# Altium PCB P-TK-05-2FC-A-MB(V1.1)-20171225.PcbDoc (part 2 of 3)
Units mm, origin at the board's own origin, x right, y up, seen from the top; angles counter-clockwise.
Board outline 82.48 x 84.99 mm, 2 copper layers (Top Layer, Bottom Layer); 89 components, 88 nets, 340 pads, 147 vias.
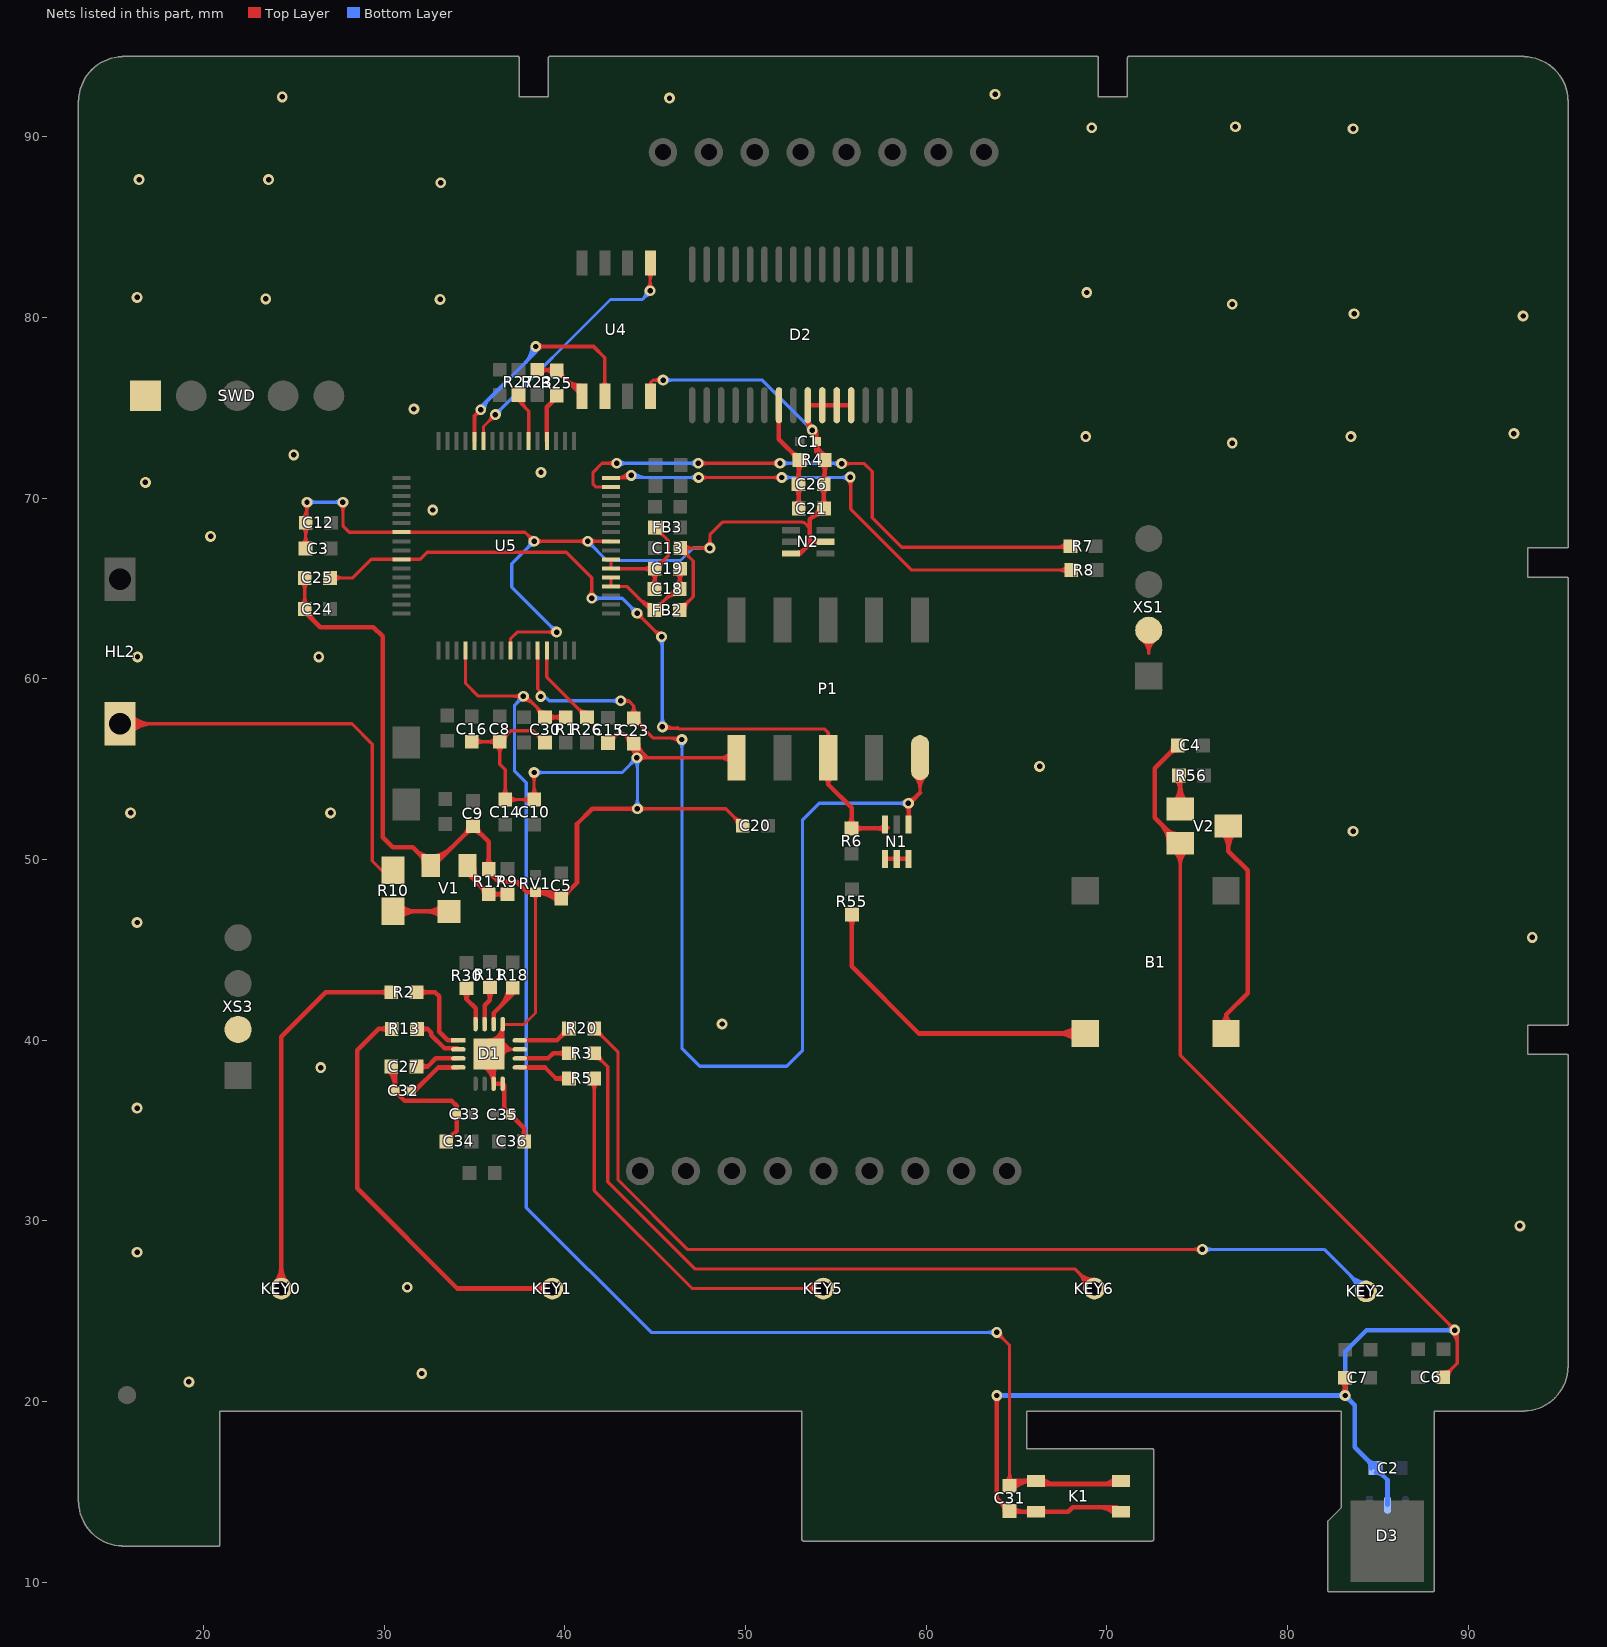
[diagram p2: the nets of this part, all layers, seen from the top]

## Via types
v1: diameter 0.6, hole 0.3, Top Layer to Bottom Layer, tented both sides, 146 vias
v2: diameter 0.5, hole 0.3, Top Layer to Bottom Layer, tented both sides, 1 vias

## Nets (pads, with @x,y where several pads share a name; then routed paths per layer and width w, separated by ;. In a path a pad name is that pad's centre, name@x,y a point inside that pad or via, vN(x,y) a via of type N, cw(c..) or ccw(c..) an arc to the next point about the centre after c; other vN are vias at no path point) (continued)
GND: C1.1 C2.1 C3.1 C4.1 C5.1 C6.1 C7.2 C8.1 C9.1 C10.2 C12.1 C13.1 C14.1 C15.1 C16.1 C20.1 C21.1 C23.2 C24.2 C25.2 C26.1 C27.2 C30.1 C31.1 C32.1 C33.1 C34.2 C35.1 C36.2 D1.7 D1.8 D1.11 D1.13 D1.17 D2.25 D2.26 D2.27 D2.28 D3.2 FB2.1 K1.2 K1.4 N1.1 N1.2 N1.3 N2.2 N2.6 P1.9 R4.1 R17.1 RV1.1 SWD.1 U4.4 U5.9 U5.25 U5.55 V1.S V2.E XS1.2 XS3.2 | length 390.1
  Top Layer w0.178: C24.2@25.397,64.062 ccw(c24.898,64.561) 25.603,64.561 ccw(c26.308,64.561) C24.2@25.81,64.062 ; C25.2@25.397,65.376 cw(c24.898,64.878) 25.603,64.878 cw(c26.308,64.878) C25.2@25.81,65.376 ; C3.1@25.447,67.415 ccw(c24.949,67.914) 25.654,67.914 ccw(c26.359,67.914) C3.1@25.861,67.415 ; C12.1@25.46,68.424 cw(c24.992,67.956) 25.654,67.956 ; C12.1@25.46,68.837 ccw(c24.805,69.493) v1@25.732,69.493 ; v1@25.582,69.624 cw(c25.222,69.264) 25.732,69.264 cw(c26.241,69.264) v1@25.881,69.624 ; C12.1@25.586,68.712 ccw(c25.234,69.064) 25.732,69.064 ; C24.2@25.603,63.856 C25.2@25.603,65.583 ; C3.1@25.654,67.208 25.654,68.631 C12.1@25.667,68.631 25.732,68.696 v1(25.732,69.774) ; 25.654,67.895 cw(c26.403,67.895) C12.1@25.873,68.424 ; 25.732,69.179 ccw(c26.215,69.179) C12.1@25.873,68.837 ; v1@27.571,69.624 cw(c27.21,69.264) 27.72,69.264 cw(c28.23,69.264) v1@27.869,69.624 ; v1(27.72,69.774) 27.72,68.46 28.069,68.111 U5.55@30.954,68.111 37.801,68.111 v1(38.301,67.611) v1(41.269,67.611) U5.25@42.554,67.611 ; C27.2@30.402,38.539 C27.2@30.605,38.336 ; C16.1@34.849,56.515 C8.1@36.398,56.515 ; C16.1@35.055,56.308 cw(c35.554,55.81) 35.554,56.515 cw(c35.554,57.22) C16.1@35.055,56.722 ; D1.17@35.754,39.996 ccw(c35.687,40.868) D1.13@36.562,40.868 ; D1.17@35.768,39.818 ccw(c35.702,40.676) D1.13@36.562,40.676 ; D1.17@35.781,39.641 ccw(c35.716,40.484) 36.562,40.484 ; R17.1@35.787,49.322 R17.1@35.787,49.474 ; D1.17@35.795,39.464 ccw(c35.731,40.292) 36.562,40.292 ; D1.17@35.808,39.287 ccw(c35.746,40.1) 36.562,40.1 ; D1.17@35.822,39.109 ccw(c35.761,39.909) D1.17@36.562,39.909 ; D1.17@36.062,38.987 36.062,39.237 D1.17@35.812,39.237 D1.17@36.062,39.487 ; C8.1@36.192,56.722 cw(c35.693,57.22) 35.693,56.515 cw(c35.693,55.81) 36.192,56.308 cw(c35.693,55.81) 36.398,55.81 cw(c37.103,55.81) C8.1@36.605,56.308 ; C8.1@36.398,56.807 ccw(c36.398,57.512) 36.897,57.014 ccw(c37.396,56.515) C8.1@36.69,56.515 ; C14.1@36.498,53.52 ccw(c35.999,54.018) 36.705,54.018 ccw(c37.41,54.018) 36.911,53.52 ccw(c37.41,54.018) 37.41,53.313 ccw(c37.41,52.608) C14.1@36.911,53.107 ; D1.13@36.562,40.887 D1.13@36.562,40.868 ; D1.13@36.588,40.912 ccw(c36.694,41.019) 36.694,40.868 ; U5.9@37.004,61.561 37.004,62.23 37.359,62.585 v1(39.549,62.585) ; 37.314,48.768 37.319,48.763 37.467,48.615 ; D1.11@37.512,39.487 36.953,39.487 36.562,39.878 D1.13@36.562,40.868 ; v1@38.09,67.611 ccw(c37.58,67.611) 37.941,67.971 ccw(c38.301,68.332) v1@38.301,67.822 ; C10.2@38.098,53.107 ccw(c37.6,52.608) 37.6,53.313 ccw(c37.6,54.018) 38.098,53.52 ccw(c37.6,54.018) 38.305,54.018 ccw(c39.01,54.018) C10.2@38.511,53.52 ; v1@38.156,54.664 cw(c37.795,54.303) 38.305,54.303 cw(c38.814,54.303) v1@38.454,54.664 ; RV1.1@38.248,48.052 cw(c37.93,47.735) 38.379,47.735 cw(c38.829,47.735) RV1.1@38.511,48.052 ; v1(38.305,54.813) C10.2@38.305,53.313 C14.1@36.705,53.313 36.705,54.965 36.398,55.272 C8.1@36.398,56.515 ; RV1.1@38.379,48.184 38.379,41.503 37.744,40.868 D1.13@36.562,40.868 ; v1@38.45,67.462 cw(c38.811,67.101) 38.811,67.611 cw(c38.811,68.12) v1@38.45,67.76 ; C30.1@38.621,56.477 ccw(c37.916,56.477) 38.414,56.976 ccw(c38.913,57.474) C30.1@38.913,56.769 ; C30.1@38.913,56.477 38.265,57.125 37.008,57.125 C8.1@36.398,56.515 ; v1@39.4,62.436 ccw(c39.04,62.076) 39.04,62.585 ccw(c39.04,63.095) v1@39.4,62.735 ; v1@41.12,67.462 ccw(c40.759,67.101) 40.759,67.611 ccw(c40.759,68.12) v1@41.12,67.76 ; v1@41.418,67.462 cw(c41.779,67.101) 41.779,67.611 cw(c41.779,68.12) v1@41.418,67.76 ; C15.1@42.393,56.452 42.913,56.972 43.256,56.972 C23.2@43.815,56.413 C23.2@43.893,56.336 ; C15.1@42.393,56.744 ccw(c42.393,57.449) 42.891,56.95 ccw(c43.39,56.452) C15.1@42.685,56.452 ; C23.2@43.523,56.413 ccw(c42.818,56.413) 43.316,56.912 ccw(c43.815,57.411) C23.2@43.815,56.706 ; C23.2@43.628,56.189 cw(c43.153,55.622) v1@43.893,55.622 ; C23.2@43.742,56.326 cw(c43.471,56.002) 43.893,56.002 ; C23.2@43.815,56.121 cw(c43.815,55.416) 44.314,55.915 cw(c44.812,56.413) C23.2@44.107,56.413 ; v1@43.893,55.626 C23.2@43.893,56.336 ; v1@43.893,55.896 cw(c44.333,55.896) C23.2@44.022,56.207 ; 43.893,55.932 ccw(c44.275,55.932) v1@44.017,55.65 ; v1(43.994,55.626) 44.603,55.626 ; v1(44.02,52.806) 48.908,52.806 C20.1@49.848,51.867 ; v1@44.137,55.782 cw(c44.644,56.336) C23.2@43.893,56.336 ; v1@44.144,55.476 cw(c44.504,55.116) 44.504,55.626 cw(c44.504,56.135) v1@44.144,55.775 ; v1@44.169,52.657 cw(c44.529,52.297) 44.529,52.806 cw(c44.529,53.316) v1@44.169,52.956 ; U4.4@44.65,76.224 ccw(c44.552,76.401) 44.755,76.401 ; U4.4@44.755,75.641 44.755,76.401 ; U4.4@44.859,76.224 cw(c44.958,76.401) 44.755,76.401 ; v1@45.293,76.381 ccw(c44.932,76.02) 44.932,76.53 ccw(c44.932,77.04) v1@45.293,76.679 ; v1(45.442,76.53) 44.883,76.53 44.755,76.401 ; FB2.1@46.368,63.805 47.11,64.547 47.11,66.517 C13.1@46.393,67.234 v1(48.033,67.234) 48.033,67.979 48.725,68.671 53.143,68.671 53.157,68.656 53.24,68.656 53.57,68.326 ; FB2.1@46.368,64.097 ccw(c46.368,64.802) 46.866,64.303 ccw(c47.365,63.805) FB2.1@46.66,63.805 ; C13.1@46.393,66.942 cw(c46.393,66.237) 46.892,66.735 cw(c47.39,67.234) C13.1@46.685,67.234 ; C13.1@46.6,67.027 cw(c47.098,66.529) 47.098,67.234 cw(c47.098,67.939) C13.1@46.6,67.44 ; v1@47.884,67.085 ccw(c47.523,66.724) 47.523,67.234 ccw(c47.523,67.743) 47.884,67.383 ccw(c47.523,67.743) 48.033,67.743 ccw(c48.543,67.743) v1@48.182,67.383 ; 48.492,55.626 ccw(c48.492,56.644) P1.9@49.212,55.924 ; 48.529,55.626 cw(c48.529,54.659) P1.9@49.212,55.343 ; 48.922,55.626 ccw(c48.922,56.215) P1.9@49.338,55.798 ; 48.958,55.626 cw(c48.958,55.088) P1.9@49.338,55.468 ; P1.9@49.503,55.633 49.503,55.626 44.603,55.626 ; C20.1@49.555,51.867 ccw(c48.85,51.867) 49.349,52.365 ccw(c49.848,52.864) C20.1@49.848,52.159 ; N2.6@52.532,66.929 N2.6@53.019,66.929 ; D2.25@53.389,74.254 cw(c53.233,74.098) 53.453,74.098 cw(c53.673,74.098) D2.25@53.518,74.254 ; D2.25@53.453,75.138 53.453,74.137 ; v1(53.697,73.761) 53.453,74.005 53.453,74.137 ; N1.1@57.728,49.682 N1.1@57.728,50.029 ; XS1.2@71.939,62.147 cw(c71.42,61.417) 72.315,61.417 ; XS1.2@72.042,62.292 cw(c71.665,61.762) 72.315,61.762 ; 72.315,61.755 cw(c72.962,61.755) XS1.2@72.595,62.288 ; XS1.2@72.322,62.686 72.315,62.68 72.315,61.417 ; XS1.2@72.696,62.141 ccw(c73.194,61.417) 72.315,61.417 ; V2.E@73.679,50.51 cw(c72.746,49.578) 74.065,49.578 cw(c75.383,49.578) V2.E@74.451,50.51 ; V2.E@73.804,50.636 cw(c73.176,50.007) 74.065,50.007 cw(c74.954,50.007) V2.E@74.325,50.636 ; V2.E@74.065,50.896 74.065,39.17 89.257,23.977 v1(89.257,23.952) 89.4,23.809 89.4,22.115 C6.1@88.621,21.336 ; C6.1@88.621,21.628 ccw(c88.621,22.333) 89.119,21.835 ccw(c89.618,21.336) C6.1@88.913,21.336 ; 88.879,24.356 cw(c88.475,23.952) v1@89.046,23.952 ; 88.94,24.294 ccw(c89.257,24.611) v1@89.257,24.163 ; v1@89.108,23.803 cw(c88.403,23.097) 89.4,23.097 ; v1@89.234,23.928 cw(c88.832,23.527) 89.4,23.527 ; C23.2@43.893,56.336 44.603,55.626 ; 53.453,74.137 ccw(c53.318,74.137) 53.399,74.245 cw(c53.318,74.137) 53.453,74.137 ; 53.453,74.137 cw(c53.589,74.137) 53.508,74.245 ccw(c53.589,74.137) 53.453,74.137
  Top Layer w0.254: C24.2@25.603,63.602 cw(c25.603,63.324) C24.2@25.8,63.52 ; C24.2@25.603,63.856 25.603,63.717 26.46,62.86 29.41,62.86 29.92,62.35 29.92,51.223 30.47,50.673 31.578,50.673 V1.S@32.587,49.664 32.743,49.664 C9.1@34.918,51.839 35.787,50.971 R17.1@35.787,49.474 ; C24.2@25.857,63.856 ccw(c26.806,63.856) 26.135,63.185 ; C27.2@30.223,38.359 cw(c29.298,37.435) C32.1@30.605,37.435 ; C27.2@30.402,38.539 cw(c29.912,38.049) 30.605,38.049 ; C32.1@30.516,37.283 ccw(c30.299,37.499) 30.605,37.499 ccw(c30.912,37.499) C32.1@30.695,37.283 ; C32.1@30.605,37.066 cw(c30.605,36.819) C32.1@30.78,36.993 ; C27.2@30.605,38.336 C32.1@30.605,37.193 30.605,37.168 31.14,36.634 33.738,36.634 34.011,36.362 C33.1@34.011,35.898 34.011,34.972 C34.2@33.435,34.396 ; C32.1@30.732,37.193 ccw(c31.098,37.193) 30.84,36.934 ; 31.719,50.531 ccw(c32.587,51.399) 32.587,50.172 ccw(c32.587,51.776) 33.721,50.642 ; 32.026,50.225 cw(c31.592,49.791) V1.S@32.206,49.791 ; V1.S@32.153,50.098 ccw(c32.587,50.531) 32.587,49.918 ccw(c32.587,50.909) 33.287,50.208 ; C34.2@33.435,34.65 ccw(c33.435,35.264) 33.869,34.83 ccw(c34.302,34.396) C34.2@33.689,34.396 ; C33.1@33.921,35.808 cw(c33.704,35.591) 34.011,35.591 cw(c34.317,35.591) C33.1@34.1,35.808 ; C33.1@33.921,35.988 ccw(c33.704,36.204) 34.011,36.204 ccw(c34.317,36.204) C33.1@34.1,35.988 ; C9.1@34.664,51.839 cw(c34.051,51.839) 34.485,51.406 cw(c34.918,50.972) 34.918,51.585 cw(c34.918,50.972) 35.352,51.406 cw(c35.785,51.839) C9.1@35.172,51.839 ; D1.17@35.456,38.608 cw(c34.868,37.568) D1.7@36.062,37.568 ; D1.17@35.581,38.829 cw(c35.114,38.004) 36.062,38.004 ; R17.1@35.607,49.653 ccw(c35.174,50.087) 35.787,50.087 ccw(c36.4,50.087) R17.1@35.967,49.653 ; R17.1@35.787,49.322 36.347,48.763 37.319,48.763 37.336,48.763 37.914,48.184 RV1.1@38.379,48.184 ; 36.062,38.095 cw(c36.954,38.095) D1.17@36.323,38.726 ; D1.17@36.062,38.987 D1.7@36.062,37.587 D1.8@36.562,37.587 36.652,37.497 36.652,36.228 C35.1@37.008,35.872 37.753,35.127 C36.2@37.753,34.396 ; D1.17@36.062,39.487 36.953,39.487 ; D1.17@36.275,39.163 cw(c36.655,39.102) D1.17@36.655,39.487 ; D1.17@36.324,39.748 ccw(c36.953,40.376) 36.953,39.487 ; D1.17@36.526,39.123 cw(c36.953,39.055) 36.953,39.487 ; D1.8@36.564,37.313 cw(c36.35,37.099) 36.652,37.099 ; C35.1@36.881,35.872 ccw(c36.574,35.872) 36.791,36.089 ccw(c37.008,36.306) C35.1@37.008,35.999 ; C35.1@37.008,35.745 cw(c37.008,35.439) 37.225,35.656 cw(c37.441,35.872) C35.1@37.135,35.872 ; C36.2@37.574,34.576 ccw(c37.14,35.01) 37.753,35.01 ccw(c38.366,35.01) C36.2@37.933,34.576 ; RV1.1@38.25,48.079 ccw(c37.997,47.827) 37.997,48.184 ccw(c37.997,48.541) RV1.1@38.25,48.288 ; RV1.1@38.509,48.079 cw(c38.762,47.827) 38.762,48.184 cw(c38.762,48.541) RV1.1@38.509,48.288 ; 38.985,48.184 cw(c38.985,47.039) C5.1@39.802,47.841 ; C5.1@39.621,47.663 ccw(c38.379,46.445) RV1.1@38.379,48.184 ; C5.1@39.802,48.095 ccw(c39.802,48.708) 40.235,48.275 ccw(c40.669,47.841) C5.1@40.056,47.841 ; v1@43.897,52.684 ccw(c43.602,52.389) 43.602,52.806 ccw(c43.602,53.224) v1@43.897,52.929 ; v1(44.02,52.806) 41.516,52.806 40.675,51.965 40.675,48.714 C5.1@39.802,47.841 ; N2.6@52.857,66.977 ccw(c52.857,67.484) 53.215,67.125 ; N2.6@53.019,66.929 53.57,67.48 ; 53.453,74.137 53.924,73.666 C1.1@53.924,73.127 ; D2.25@53.453,75.138 D2.26@54.253,75.138 D2.27@55.053,75.138 D2.28@55.853,75.138 ; D2.25@53.506,74.318 ccw(c54.073,74.318) v1@53.672,73.918 ; 53.594,68.854 cw(c54.343,68.104) C21.1@54.343,69.164 ; v1@53.614,73.61 cw(c53.329,73.087) C1.1@53.924,73.087 ; v1@53.736,73.832 cw(c53.563,73.515) 53.924,73.515 ; C1.1@53.834,73.037 cw(c53.618,72.82) 53.924,72.82 cw(c54.231,72.82) C1.1@54.014,73.037 ; C1.1@53.834,73.216 ccw(c53.618,73.433) 53.924,73.433 ccw(c54.231,73.433) C1.1@54.014,73.216 ; 53.924,72.77 ccw(c54.622,72.77) R4.1@54.394,72.111 ; R4.1@54.14,72.111 ccw(c53.527,72.111) 53.961,72.544 ccw(c54.394,72.978) R4.1@54.394,72.365 ; C26.1@54.151,70.585 cw(c53.717,70.151) 54.331,70.151 cw(c54.944,70.151) C26.1@54.51,70.585 ; C26.1@54.151,70.944 ccw(c53.564,71.531) 54.394,71.531 ; C21.1@54.164,69.598 ccw(c53.761,70.001) 54.331,70.001 ; R4.1@54.215,71.931 cw(c53.781,71.497) 54.394,71.497 cw(c55.007,71.497) R4.1@54.574,71.931 ; 54.331,70.062 ccw(c54.987,70.062) C21.1@54.523,69.598 ; 54.394,71.224 ccw(c54.791,71.224) C26.1@54.51,70.944 ; N2.2@54.432,67.579 53.669,67.579 53.57,67.48 ; R4.1@54.477,72.351 cw(c54.745,73.127) C1.1@53.924,73.127 ; N1.1@57.728,50.029 N1.2@58.378,50.029 N1.3@59.028,50.029 ; v1@63.788,20.208 cw(c63.492,19.912) 63.91,19.912 cw(c64.328,19.912) v1@64.032,20.208 ; v1(63.91,20.33) 63.91,14.645 C31.1@64.616,13.939 64.653,13.902 K1.2@66.089,13.902 67.861,13.902 68.108,14.149 70.541,14.149 K1.4@70.788,13.902 ; C31.1@64.362,13.939 ccw(c63.749,13.939) 64.182,14.373 ccw(c64.616,14.806) C31.1@64.616,14.193 ; C31.1@64.796,13.76 cw(c65.14,13.415) 65.14,13.902 ; C31.1@64.796,14.119 ccw(c65.319,14.642) 65.319,13.902 ; K1.2@65.774,13.762 ccw(c65.436,13.424) 65.436,13.902 ccw(c65.436,14.38) K1.2@65.774,14.042 ; K1.2@66.404,13.762 cw(c66.742,13.424) 66.742,13.902 cw(c66.742,14.38) K1.2@66.404,14.042 ; 69.539,14.149 cw(c69.539,12.828) K1.4@70.473,13.762 ; 70.152,14.149 cw(c70.152,13.441) K1.4@70.653,13.942 ; 72.981,51.98 cw(c71.897,50.896) V2.E@73.43,50.896 ; 73.287,51.674 ccw(c73.938,52.324) V2.E@73.938,51.404 ; 73.414,51.547 cw(c72.764,50.896) V2.E@73.684,50.896 ; C4.1@73.673,56.312 cw(c73.06,56.312) 73.493,55.878 cw(c73.927,55.445) C4.1@73.927,56.058 ; C4.1@73.927,56.312 72.66,55.045 72.66,52.301 V2.E@74.065,50.896 ; C7.2@83.005,21.131 cw(c82.572,20.697) 83.185,20.697 cw(c83.798,20.697) C7.2@83.365,21.131 ; v1@83.068,20.452 ccw(c82.784,20.736) 83.185,20.736 ; 83.185,20.76 ccw(c83.62,20.76) v1@83.312,20.452 ; C7.2@83.185,21.311 v1@83.185,20.355 ; RV1.1@38.379,48.184 39.459,48.184 C5.1@39.802,47.841 ; 53.57,67.48 53.57,68.326 53.57,68.83 54.158,69.418 C21.1@54.343,69.418 54.331,69.431 C26.1@54.331,70.764 54.394,70.828 R4.1@54.394,72.111 ; C1.1@53.924,73.127 53.924,72.581 R4.1@54.394,72.111 ; v1@83.185,20.355 83.2,20.34 83.21,20.33 v1(83.19,20.33) v1@83.185,20.355
  Bottom Layer w0.178: v1(25.732,69.774) v1(27.72,69.774) ; v1@25.881,69.624 cw(c26.241,69.264) 26.241,69.774 cw(c26.241,70.283) v1@25.881,69.923 ; v1@27.571,69.624 ccw(c27.21,69.264) 27.21,69.774 ccw(c27.21,70.283) v1@27.571,69.923 ; v1@38.09,67.611 cw(c37.58,67.611) 37.941,67.25 cw(c38.301,66.89) v1@38.301,67.4 ; v1(38.301,67.611) 37.06,66.37 37.06,65.075 v1(39.549,62.585) ; v1(38.305,54.813) 43.182,54.813 v1@43.944,55.575 ; v1@38.454,54.664 cw(c38.814,54.303) 38.814,54.813 cw(c38.814,55.323) v1@38.454,54.962 ; v1@39.338,62.585 ccw(c38.829,62.585) 39.189,62.946 ccw(c39.549,63.306) v1@39.549,62.796 ; v1@41.269,67.4 cw(c41.269,66.89) 41.629,67.25 cw(c41.99,67.611) v1@41.48,67.611 ; v1(41.269,67.611) 42.332,66.548 46.407,66.548 47.093,67.234 v1(48.033,67.234) ; v1@43.783,55.626 cw(c43.274,55.626) 43.634,55.265 cw(c43.994,54.905) v1@43.994,55.415 ; v1@43.845,55.476 cw(c43.423,55.055) 44.02,55.055 ; v1@43.87,52.956 ccw(c43.51,53.316) 44.02,53.316 ccw(c44.529,53.316) v1@44.169,52.956 ; v1@43.893,55.626 v1@43.944,55.575 ; v1(43.994,55.626) v1@43.944,55.575 ; v1(44.02,52.806) 44.02,55.499 v1@43.944,55.575 ; 44.02,55.177 cw(c44.443,55.177) v1@44.144,55.476 ; v1(45.442,76.53) 50.929,76.53 v1(53.697,73.761) ; v1@45.591,76.381 cw(c45.952,76.02) 45.952,76.53 cw(c45.952,77.04) v1@45.591,76.679 ; v1@47.884,67.085 ccw(c47.523,66.724) 47.523,67.234 ccw(c47.523,67.743) v1@47.884,67.383 ; v1@53.486,73.761 ccw(c52.976,73.761) 53.337,74.122 ccw(c53.697,74.482) v1@53.697,73.972
  Bottom Layer w0.254: v1(63.91,20.33) v1(83.19,20.33) ; v1@64.032,20.208 cw(c64.328,19.912) 64.328,20.33 cw(c64.328,20.748) v1@64.032,20.452 ; v1@83.068,20.208 ccw(c82.772,19.912) 82.772,20.33 ccw(c82.772,20.748) 83.068,20.452 ccw(c82.772,20.748) 83.19,20.748 ccw(c83.608,20.748) v1@83.312,20.452 ; v1@83.185,20.355 v1(83.19,20.33) ; v1@83.19,20.157 cw(c83.19,19.739) 83.485,20.035 cw(c83.781,20.33) v1@83.363,20.33 ; C2.1@84.623,16.313 ccw(c84.01,16.313) 84.443,16.747 ccw(c84.877,17.18) C2.1@84.877,16.567 ; C2.1@84.877,16.059 cw(c84.877,15.446) 85.311,15.88 cw(c85.744,16.313) C2.1@85.131,16.313 ; D3.2@85.534,14.281 85.534,15.656 C2.1@84.877,16.313 83.731,17.459 83.731,19.789 v1(83.19,20.33) ; v1@89.135,23.83 ccw(c88.839,23.534) 88.839,23.952 ccw(c88.839,24.37) v1@89.135,24.074 ; v1(89.257,23.952) 84.372,23.952 83.19,22.77 v1(83.19,20.33)
  other v1: 19.2,21.082 32.082,21.55 31.28,26.32 16.334,28.26 92.86,29.718 16.334,36.24 26.494,38.48 48.71,40.894 93.55,45.69 16.334,46.51 83.63,51.562 15.97,52.578 27.04,52.578 66.28,55.15 16.35,61.214 26.38,61.214 20.398,67.88 32.69,69.342 16.79,70.866 38.686,71.42 25,72.39 76.94,73.04 68.83,73.406 83.51,73.406 92.534,73.57 31.65,74.93 93.042,80.08 83.69,80.2 76.94,80.73 33.098,81 23.45,81.026 16.334,81.11 68.89,81.38 33.14,87.453 16.44,87.63 23.61,87.63 83.63,90.44 69.166,90.5 77.12,90.55 45.798,92.14 24.36,92.202 63.82,92.35
ISP0: R26.2 U5.13 | length 5.7
  Top Layer w0.178: U5.13@39.004,61.561 39.004,60.094 R26.2@41.224,57.874 ; R26.2@40.932,57.874 ccw(c40.227,57.874) 40.726,58.373 ccw(c41.224,58.871) R26.2@41.224,58.166
ISP1: R27.2 U5.38 | length 4
  Top Layer w0.178: R27.2@37.44,75.705 37.44,75.38 38.004,74.816 U5.38@38.004,73.161 ; R27.2@37.546,75.663 ccw(c37.974,75.496) 37.649,75.171 ; R27.2@37.712,75.598 ccw(c38.251,75.388) 37.842,74.978
KEY: C30.2 C31.2 K1.1 K1.3 R1.1 U5.4 | length 94.4
  Top Layer w0.178: U5.4@34.504,61.561 34.504,59.756 35.22,59.04 v1@37.747,59.04 ; 37.175,59.04 cw(c37.175,58.494) v1@37.561,58.88 ; 37.226,59.04 ccw(c37.226,59.513) v1@37.561,59.179 ; v1@37.71,58.818 cw(c37.71,57.977) 38.305,58.572 ; v1@37.71,58.996 cw(c37.71,58.584) 38.002,58.875 ; v1(37.71,59.029) 37.848,59.029 C30.2@39.003,57.874 ; 38.35,58.526 cw(c37.698,57.874) C30.2@38.621,57.874 ; 38.568,58.309 ccw(c38.913,58.654) C30.2@38.913,58.166 ; C30.2@38.654,58.223 cw(c38.305,57.874) C30.2@38.799,57.874 ; v1@63.908,23.614 cw(c63.908,23.104) 64.268,23.465 cw(c64.629,23.825) v1@64.119,23.825 ; v1(63.908,23.825) 64.616,23.117 C31.2@64.616,15.336 64.616,15.602 C31.2@64.882,15.602 ; C31.2@64.409,15.543 ccw(c63.911,16.041) 64.616,16.041 ccw(c65.321,16.041) C31.2@64.823,15.543 ; K1.3@70.619,15.433 70.619,15.602 K1.3@70.788,15.602
  Top Layer w0.254: C30.2@38.913,57.874 R1.1@40.056,57.874 ; C30.2@39.092,57.694 cw(c39.526,57.261) 39.526,57.874 cw(c39.526,58.487) C30.2@39.092,58.054 ; R1.1@39.876,57.694 ccw(c39.443,57.261) 39.443,57.874 ccw(c39.443,58.487) R1.1@39.876,58.054 ; C31.2@64.616,15.336 cw(c65.258,14.694) 65.258,15.602 ; C31.2@64.796,15.157 cw(c65.871,14.081) K1.1@65.871,15.602 ; C31.2@64.882,15.602 K1.1@66.089,15.602 66.258,15.433 K1.3@70.619,15.433 ; K1.1@65.774,15.462 ccw(c65.436,15.124) 65.436,15.602 ccw(c65.436,16.08) K1.1@65.774,15.742 ; K1.1@66.404,15.742 ccw(c67.151,16.489) 67.151,15.433 ; 69.726,15.433 ccw(c69.726,16.489) K1.3@70.473,15.742
  Bottom Layer w0.178: v1@37.499,59.029 cw(c36.989,59.029) 37.35,58.669 cw(c37.71,58.309) v1@37.71,58.818 ; v1(37.71,59.029) 37.221,58.54 37.213,58.54 37.213,54.915 37.873,54.254 37.873,30.734 44.782,23.825 v1(63.908,23.825) ; v1@63.759,23.676 ccw(c63.398,23.315) 63.398,23.825 ccw(c63.398,24.335) v1@63.759,23.974
KEY0: KEY0.1 R2.2 | length 23.8
  Top Layer w0.254: KEY0.1@23.976,26.588 ccw(c23.168,27.395) 24.31,27.395 ccw(c25.452,27.395) KEY0.1@24.645,26.588 ; KEY0.1@24.31,26.253 24.31,40.19 26.774,42.654 R2.2@30.402,42.654 ; R2.2@30.223,42.474 ccw(c29.789,42.041) 29.789,42.654 ccw(c29.789,43.267) R2.2@30.223,42.833
KEY1: KEY1.1 R13.2 | length 25.9
  Top Layer w0.254: R13.2@30.248,40.442 ccw(c29.814,40.009) 29.814,40.622 ccw(c29.814,41.235) R13.2@30.248,40.801 ; R13.2@30.428,40.622 29.702,40.622 28.51,39.43 28.51,31.8 34.057,26.253 KEY1.1@39.31,26.253 ; KEY1.1@38.976,25.919 ccw(c38.168,25.111) 38.168,26.253 ccw(c38.168,27.395) KEY1.1@38.976,26.588
KEY2: KEY2.1 R20.2 | length 58.8
  Top Layer w0.178: R20.2@41.629,40.355 cw(c41.629,39.65) 42.128,40.149 cw(c42.626,40.647) R20.2@41.921,40.647 ; R20.2@41.629,40.647 42.95,39.326 42.95,32.26 46.79,28.42 v1(75.29,28.42) ; v1@75.141,28.271 ccw(c74.78,27.91) 74.78,28.42 ccw(c74.78,28.93) v1@75.141,28.569
  Bottom Layer w0.178: v1(75.29,28.42) 82.025,28.42 KEY2.1@84.352,26.093 ; v1@75.439,28.271 cw(c75.8,27.91) 75.8,28.42 cw(c75.8,28.93) v1@75.439,28.569 ; KEY2.1@83.841,26.093 ccw(c82.607,26.093) 83.479,26.966 ccw(c84.352,27.838) KEY2.1@84.352,26.604 ; KEY2.1@84.018,26.093 ccw(c83.214,26.093) 83.783,26.662 ccw(c84.352,27.231) KEY2.1@84.352,26.426
KEY5: KEY5.1 R5.2 | length 25.4
  Top Layer w0.178: R5.2@41.422,37.672 cw(c40.924,37.173) 41.629,37.173 cw(c42.334,37.173) R5.2@41.836,37.672 ; R5.2@41.629,37.879 41.629,31.671 47.047,26.253 KEY5.1@54.31,26.253 ; KEY5.1@53.949,25.892 ccw(c53.076,25.019) 53.076,26.253 ccw(c53.076,27.487) KEY5.1@53.949,26.615 ; KEY5.1@54.074,26.018 ccw(c53.505,25.449) 53.505,26.253 ccw(c53.505,27.058) KEY5.1@54.074,26.489
KEY6: KEY6.1 R3.2 | length 41.1
  Top Layer w0.178: R3.2@41.629,38.984 cw(c41.629,38.278) 42.128,38.777 cw(c42.626,39.276) R3.2@41.921,39.276 ; R3.2@41.629,39.276 42.38,38.525 42.38,32.16 47.2,27.34 68.223,27.34 KEY6.1@69.31,26.253 ; KEY6.1@68.799,26.253 ccw(c67.565,26.253) 68.438,27.126 ccw(c69.31,27.998) KEY6.1@69.31,26.764 ; KEY6.1@68.977,26.253 ccw(c68.172,26.253) 68.741,26.822 ccw(c69.31,27.391) KEY6.1@69.31,26.586
MISO: U4.2 U5.44 | length 16.4
  Top Layer w0.2: U5.44@35.004,73.161 35.004,74.544 v1(35.35,74.89) v1@35.21,74.89 ; v1(38.39,78.39) 41.59,78.39 42.215,77.765 U4.2@42.215,75.641 ; v1@38.532,78.249 cw(c38.873,77.907) 38.873,78.39 cw(c38.873,78.873) v1@38.532,78.531 ; U4.2@42.07,76.18 ccw(c41.72,76.529) 42.215,76.529 ccw(c42.709,76.529) U4.2@42.36,76.18
  Bottom Layer w0.2: v1@35.28,74.96 38.39,78.07 ; v1@35.55,74.89 cw(c36.371,74.89) 35.791,75.471 ; 37.823,77.503 ccw(c36.935,78.39) v1@38.19,78.39 ; 38.164,77.844 ccw(c37.618,78.39) v1(38.39,78.39)
MOSI: U4.5 U5.43 | length 18.7
  Top Layer w0.178: U5.43@35.504,73.161 35.504,73.964 v1(36.16,74.62) ; v1@35.949,74.62 cw(c35.439,74.62) 35.8,74.26 cw(c36.16,73.899) v1@36.16,74.409 ; v1@44.571,81.629 ccw(c44.21,81.99) 44.72,81.99 ccw(c45.23,81.99) v1@44.869,81.629 ; U4.5@44.602,82.461 cw(c44.318,82.176) 44.72,82.176 ; v1(44.72,81.48) 44.72,82.972 U4.5@44.755,83.007 ; 44.72,82.008 cw(c45.36,82.008) U4.5@44.907,82.461
  Bottom Layer w0.178: v1(36.16,74.62) 42.53,80.99 44.299,80.99 44.72,81.411 v1(44.72,81.48) ; v1@36.16,74.831 ccw(c36.16,75.341) 36.52,74.98 ccw(c36.881,74.62) v1@36.371,74.62 ; 44.334,81.025 ccw(c43.911,81.448) v1@44.509,81.472 ; 44.478,81.169 cw(c44.72,80.927) v1@44.72,81.269
N\R\S\T\: C23.1 N1.4 P1.1 U5.12 | length 71
  Top Layer w0.178: U5.12@38.504,61.561 38.504,59.436 v1@38.67,59.27 ; 38.57,59.37 cw(c38.348,59.149) v1@38.639,59.032 ; v1(43.1,58.78) 43.53,58.78 ; v1@43.267,58.651 cw(c43.53,58.448) 43.53,58.78 ; v1@43.267,58.909 ccw(c43.53,59.112) 43.53,58.78 ; C23.1@43.613,58.021 ccw(c43.159,58.495) 43.815,58.495 ; C23.1@43.815,57.518 cw(c43.815,56.813) 44.314,57.312 cw(c44.812,57.81) C23.1@44.107,57.81 ; C23.1@44.017,58.021 cw(c44.471,58.495) 43.815,58.495 ; 45.782,56.718 cw(c45.782,55.942) v1@46.331,56.491 ; 46.159,56.718 ccw(c46.159,56.961) v1@46.331,56.789 ; v1(46.48,56.64) 46.48,56.714 46.484,56.718 44.907,56.718 C23.1@43.815,57.81 43.815,58.495 ; P1.1@59.372,54.593 cw(c58.671,53.891) 59.663,53.891 cw(c60.655,53.891) P1.1@59.954,54.593 ; P1.1@59.498,54.718 cw(c59.1,54.32) 59.663,54.32 cw(c60.226,54.32) P1.1@59.828,54.718 ; 59.663,53.743 P1.1@59.663,55.633 ; 43.53,58.78 43.815,58.495
  Top Layer w0.254: v1@58.898,52.988 cw(c58.584,52.674) 59.028,52.674 ; v1@59.02,53.283 ccw(c59.02,53.87) 59.435,53.455 ; N1.4@59.028,51.929 59.028,53.048 59.663,53.683 ; 59.028,52.711 cw(c59.419,52.711) v1@59.142,52.988 ; v1@59.193,53.11 cw(c59.442,53.11) 59.266,53.286
  Bottom Layer w0.178: v1@38.67,59.27 v1(38.67,59.02) 38.9,59.02 39.14,58.78 43.53,58.78 ; v1@38.678,58.988 cw(c38.767,58.624) 39.031,58.889 ; v1@42.951,58.631 ccw(c42.59,58.27) 42.59,58.78 ccw(c42.59,59.29) v1@42.951,58.929 ; v1@43.267,58.651 cw(c43.53,58.448) 43.53,58.78 ; v1@43.267,58.909 ccw(c43.53,59.112) 43.53,58.78 ; v1@46.331,56.491 cw(c45.962,56.121) 46.484,56.121 ; v1(46.48,56.64) 46.48,56.714 46.484,56.718 46.484,39.548 47.474,38.557 52.297,38.557 53.15,39.41 53.15,52.18 54.081,53.111 59.031,53.111 59.03,53.11 v1(59.02,53.11) ; 46.484,56.139 cw(c46.981,56.139) v1@46.629,56.491 ; 58.507,53.111 cw(c58.507,52.597) v1@58.871,52.961 ; 58.513,53.111 ccw(c58.513,53.616) v1@58.871,53.259
NetB1_1: B1.1 R55.1 | length 22
  Top Layer w0.254: R55.1@55.71,46.77 cw(c55.277,46.337) 55.89,46.337 cw(c56.503,46.337) R55.1@56.07,46.77 ; R55.1@55.89,46.95 55.89,44.08 59.602,40.368 B1.1@68.807,40.368 ; B1.1@68.366,39.927 ccw(c67.303,38.864) 67.303,40.368 ccw(c67.303,41.872) B1.1@68.366,40.808 ; B1.1@68.546,40.107 ccw(c67.916,39.477) 67.916,40.368 ccw(c67.916,41.259) B1.1@68.546,40.629
NetB1_2: B1.2 V2.C | length 15.6
  Top Layer w0.254: B1.2@76.307,40.914 ccw(c76.03,41.42) 76.607,41.42 ; V2.C@76.373,51.489 cw(c75.505,50.622) 76.732,50.622 cw(c77.958,50.622) V2.C@77.091,51.489 ; B1.2@76.607,40.368 76.607,41.42 ; V2.C@76.732,51.849 76.732,50.458 77.79,49.4 77.79,42.603 76.607,41.42 ; B1.2@76.906,40.914 cw(c77.184,41.42) 76.607,41.42
NetC18_1: C18.1 C19.1 FB3.1 U5.22 U5.23 | length 12.5
  Top Layer w0.178: U5.23@42.554,66.611 U5.22@42.554,66.111 42.577,66.087 C19.1@44.986,66.087 ; C18.1@44.764,65.18 ccw(c44.266,65.678) 44.971,65.678 ccw(c45.676,65.678) C18.1@45.177,65.18 ; C19.1@44.78,66.294 cw(c44.281,66.793) 44.281,66.087 cw(c44.281,65.382) 44.78,65.881 cw(c44.318,65.419) 44.971,65.419 ; C18.1@44.971,64.973 44.971,66.072 C19.1@44.986,66.087 ; C18.1@44.971,65.345 cw(c45.728,65.345) C19.1@45.193,65.881 ; C19.1@44.986,66.38 ccw(c44.986,67.091) 45.489,66.588 ; FB3.1@44.996,68.085 cw(c44.996,67.38) 45.495,67.878 cw(c45.993,68.377) FB3.1@45.288,68.377 ; FB3.1@44.996,68.377 45.745,67.628 45.745,66.844 44.989,66.087 C19.1@44.986,66.087 ; C19.1@45.278,66.087 cw(c45.977,66.087) 45.483,66.581
NetC18_2: C18.2 C19.2 FB2.2 U5.20 U5.21 | length 13.1
  Top Layer w0.178: U5.21@42.554,65.611 U5.20@42.554,65.111 43.429,65.111 44.735,63.805 FB2.2@44.971,63.805 46.139,64.973 C18.2@46.368,64.973 46.368,66.072 C19.2@46.383,66.087 ; 44.07,64.47 ccw(c44.971,65.371) 44.971,64.097 ccw(c44.971,64.802) 45.469,64.303 ccw(c45.968,63.805) FB2.2@45.263,63.805 ; 44.374,64.166 ccw(c44.971,64.764) FB2.2@44.971,63.919 ; 45.479,64.313 cw(c46.368,63.424) C18.2@46.368,64.681 ; 45.782,64.616 cw(c46.368,64.031) C18.2@46.368,64.859 ; C18.2@46.161,65.18 ccw(c45.663,65.678) 46.368,65.678 ccw(c47.073,65.678) C18.2@46.574,65.18 ; C19.2@46.177,65.881 cw(c45.715,65.419) 46.368,65.419 ; C18.2@46.368,65.345 cw(c47.125,65.345) C19.2@46.59,65.881
NetC21_2: C21.2 C26.2 D2.23 R4.2 | length 11
  Top Layer w0.254: D2.23@51.853,75.138 51.85,75.135 51.85,73.258 R4.2@52.997,72.111 52.946,72.06 52.946,70.764 C21.2@52.946,69.418 ; R4.2@52.743,72.111 ccw(c52.13,72.111) 52.564,72.544 ccw(c52.997,72.978) R4.2@52.997,72.365 ; C26.2@52.754,70.585 cw(c52.29,70.121) 52.946,70.121 ; C26.2@52.754,70.944 ccw(c52.29,71.408) 52.946,71.408 ; C21.2@52.767,69.598 ccw(c52.333,70.031) 52.946,70.031 ccw(c53.56,70.031) C21.2@53.126,69.598 ; R4.2@52.818,71.931 cw(c52.507,71.62) 52.946,71.62 ; 52.946,70.182 cw(c53.516,70.182) C26.2@53.113,70.585 ; 52.946,71.347 ccw(c53.516,71.347) C26.2@53.113,70.944 ; 52.946,71.375 cw(c53.733,71.375) R4.2@53.177,71.931
NetC27_1: C27.1 D1.3 | length 3.5
  Top Layer w0.254: C27.1@31.799,38.539 32.409,38.539 ; C27.1@31.979,38.36 cw(c32.409,37.934) 32.409,38.539 ; C27.1@31.979,38.718 ccw(c32.409,39.144) 32.409,38.539 ; D1.3@34.112,38.987 32.857,38.987 32.409,38.539
NetC32_2: C32.2 D1.4 | length 3.7
  Top Layer w0.254: C32.2@31.52,37.193 31.693,37.193 32.987,38.487 D1.4@34.112,38.487 ; C32.2@31.52,37.32 ccw(c31.52,38.044) 32.032,37.532
NetD1_1: D1.1 R2.1 | length 5.5
  Top Layer w0.254: R2.1@31.799,42.654 32.816,42.654 33.05,42.42 33.05,40.46 33.523,39.987 D1.1@34.112,39.987 ; R2.1@31.979,42.474 cw(c32.412,42.041) 32.412,42.654 cw(c32.412,43.267) R2.1@31.979,42.833
NetD1_2: D1.2 R13.1 | length 3.9
  Top Layer w0.254: R13.1@31.825,40.622 32.401,40.622 ; R13.1@32.012,40.45 cw(c32.401,40.094) 32.401,40.622 ; R13.1@32.012,40.793 ccw(c32.401,41.149) 32.401,40.622 ; 33.677,39.555 cw(c33.677,39.327) D1.2@33.839,39.488 ; D1.2@34.112,39.487 34.044,39.555 33.344,39.555 32.618,40.281 32.618,40.405 32.401,40.622
NetD1_9: D1.9 R5.1 | length 3.9
  Top Layer w0.254: D1.9@37.512,38.487 38.907,38.487 39.515,37.879 R5.1@40.232,37.879 ; R5.1@40.052,37.699 ccw(c39.619,37.265) 39.619,37.879 ccw(c39.619,38.492) R5.1@40.052,38.058
NetD1_10: D1.10 R3.1 | length 3.8
  Top Layer w0.254: D1.10@37.512,38.987 39.07,38.987 39.359,39.276 R3.1@40.232,39.276 ; R3.1@40.052,39.096 ccw(c39.619,38.662) 39.619,39.276 ccw(c39.619,39.889) R3.1@40.052,39.455
NetD1_12: D1.12 R20.1 | length 4
  Top Layer w0.254: D1.12@37.512,39.987 39.572,39.987 R20.1@40.232,40.647 ; R20.1@39.978,40.647 cw(c39.365,40.647) 39.798,40.214 cw(c40.232,39.78) R20.1@40.232,40.393
NetD1_14: D1.14 R18.2 | length 4.2
  Top Layer w0.254: D1.14@36.062,40.887 36.062,41.502 37.127,42.567 R18.2@37.127,42.904 cw(c36.313,42.904) 36.888,42.329 ; 36.455,41.895 ccw(c35.446,42.904) R18.2@36.873,42.904
NetD1_15: D1.15 R11.1 | length 3.1
  Top Layer w0.254: D1.15@35.562,40.887 35.562,41.922 35.858,42.218 R11.1@35.858,42.922 ; R11.1@35.679,42.742 cw(c35.245,42.309) 35.858,42.309 cw(c36.472,42.309) R11.1@36.038,42.742
NetD1_16: D1.16 R30.2 | length 3.2
  Top Layer w0.254: R30.2@34.383,42.691 cw(c33.95,42.258) 34.563,42.258 cw(c35.176,42.258) R30.2@34.743,42.691 ; R30.2@34.563,42.871 34.563,42.257 35.062,41.758 D1.16@35.062,40.887
NetHL2_K: HL2.K R10.2 | length 29.2
  Top Layer w0.178: HL2.K@15.385,57.503 15.385,57.505 28.225,57.505 29.347,56.383 29.347,49.913 29.857,49.403 ; HL2.K@15.671,57.216 cw(c16.369,56.519) 16.369,57.505 ; HL2.K@15.671,57.79 ccw(c16.359,58.477) 16.359,57.505 ; HL2.K@15.797,57.091 cw(c16.798,56.09) 16.798,57.505 ; HL2.K@15.797,57.916 ccw(c16.788,58.906) 16.788,57.505 ; HL2.K@15.923,56.965 cw(c17.227,55.661) 17.227,57.505 ; HL2.K@15.923,58.041 ccw(c17.217,59.336) 17.217,57.505 ; R10.2@29.964,49.494 cw(c29.857,49.511) 29.857,49.403 ; R10.2@29.967,49.312 ccw(c29.857,49.292) 29.857,49.403 ; R10.2@30.504,49.41 30.504,49.403 29.857,49.403
NetR9_2: R9.2 R17.2 V1.G | length 8.1
  Top Layer w0.254: V1.G@34.619,49.664 34.619,49.245 R17.2@35.787,48.077 R9.2@36.828,48.077 ; V1.G@34.746,49.537 ccw(c35.757,49.537) 35.042,48.822 ; V1.G@35,49.537 ccw(c36.625,49.537) R17.2@35.476,48.388 ; R17.2@35.533,48.077 ccw(c34.92,48.077) 35.353,48.51 ccw(c35.787,48.944) R17.2@35.787,48.331 ; R17.2@35.967,47.897 cw(c36.4,47.464) 36.4,48.077 cw(c36.4,48.69) R17.2@35.967,48.256 ; R9.2@36.649,47.897 ccw(c36.215,47.464) 36.215,48.077 ccw(c36.215,48.69) R9.2@36.649,48.256
NetR10_1: R10.1 V1.D | length 7
  Top Layer w0.254: R10.1@30.504,47.124 V1.D@33.603,47.124 ; R10.1@30.863,46.765 cw(c31.73,45.898) 31.73,47.124 cw(c31.73,48.351) R10.1@30.863,47.483 ; V1.D@33.243,46.765 ccw(c32.376,45.898) 32.376,47.124 ccw(c32.376,48.351) V1.D@33.243,47.483
NetR25_2: R25.2 U5.36 | length 2.7
  Top Layer w0.254: U5.36@39.004,73.161 39.004,75.034 39.55,75.581 R25.2@39.55,75.67
NetR56_1: R56.1 V2.B | length 4.8
  Top Layer w0.254: V2.B@73.706,53.16 ccw(c72.838,54.028) 74.065,54.028 ccw(c75.291,54.028) V2.B@74.424,53.16 ; R56.1@73.809,54.463 cw(c73.191,53.846) 74.065,53.846 ; R56.1@73.989,54.643 74.065,54.566 V2.B@74.065,52.801 ; 74.065,54.213 cw(c74.418,54.213) R56.1@74.168,54.463
NSS: R23.2 R25.1 U4.1 | length 8.8
  Top Layer w0.178: R23.2@38.481,77.102 39.516,77.102 R25.1@39.55,77.067 40.945,75.673 U4.1@40.945,75.641 ; R23.2@38.688,76.895 cw(c39.186,76.397) 39.186,77.102 cw(c39.186,77.807) R23.2@38.688,77.308 ; R23.2@38.762,77.102 cw(c38.762,76.278) R25.1@39.344,76.861 ; 38.929,77.102 ccw(c38.929,77.689) R25.1@39.344,77.274 ; R25.1@39.55,76.775 cw(c39.55,76.07) 40.049,76.568 cw(c40.548,77.067) R25.1@39.843,77.067 ; 39.958,76.66 ccw(c40.945,77.646) U4.1@40.945,76.251 ; 40.261,76.356 ccw(c40.945,77.039) U4.1@40.945,76.073 ; 40.565,76.053 ccw(c40.945,76.432) U4.1@40.945,75.895 ; U4.1@40.868,75.749 ccw(c40.945,75.825) U4.1@40.945,75.717
PIO0_0: R7.1 U5.31 | length 39.6
  Top Layer w0.178: U5.31@42.554,70.611 41.729,70.611 41.57,70.77 41.57,71.44 42.06,71.93 v1(42.88,71.93) ; v1@42.731,71.781 ccw(c42.37,71.42) 42.37,71.93 ccw(c42.37,72.44) v1@42.731,72.079 ; v1(47.39,71.93) v1(51.91,71.93) ; v1@47.539,71.781 cw(c47.9,71.42) 47.9,71.93 cw(c47.9,72.44) v1@47.539,72.079 ; v1@51.761,71.781 ccw(c51.4,71.42) 51.4,71.93 ccw(c51.4,72.44) v1@51.761,72.079 ; v1(55.32,71.91) 56.58,71.91 57.02,71.47 57.02,68.91 57.023,68.907 58.65,67.28 67.928,67.28 R7.1@67.983,67.335 ; v1@55.469,71.761 cw(c55.83,71.4) 55.83,71.91 cw(c55.83,72.42) v1@55.469,72.059 ; 67.144,67.28 ccw(c67.144,68.174) R7.1@67.777,67.542 ; 67.412,67.28 cw(c67.412,66.764) R7.1@67.777,67.129 ; 67.573,67.28 ccw(c67.573,67.745) R7.1@67.902,67.416
  Bottom Layer w0.178: v1(42.88,71.93) v1(47.39,71.93) ; v1@43.029,71.781 cw(c43.39,71.42) 43.39,71.93 cw(c43.39,72.44) v1@43.029,72.079 ; v1@47.241,71.781 ccw(c46.88,71.42) 46.88,71.93 ccw(c46.88,72.44) v1@47.241,72.079 ; v1(51.91,71.93) v1@55.3,71.93 ; v1@52.059,71.781 cw(c52.42,71.42) 52.42,71.93 cw(c52.42,72.44) v1@52.059,72.079 ; 54.762,71.93 cw(c54.762,71.352) v1@55.171,71.761 ; 54.859,71.93 ccw(c54.859,72.371) v1@55.171,72.059
PIO0_1: R8.2 U5.32 | length 37.5
  Top Layer w0.178: U5.32@42.554,71.111 43.829,71.111 v1(43.68,71.26) ; U5.32@42.81,71.111 ccw(c42.81,72.129) v1@43.531,71.409 ; 43.24,71.111 ccw(c43.24,71.7) v1@43.656,71.283 ; v1(47.41,71.14) v1(52.01,71.14) ; v1@47.559,70.991 cw(c47.92,70.63) 47.92,71.14 cw(c47.92,71.649) v1@47.559,71.289 ; v1@51.861,70.991 ccw(c51.5,70.63) 51.5,71.14 ccw(c51.5,71.649) v1@51.861,71.289 ; v1@55.651,71.011 cw(c55.217,70.577) 55.83,70.577 ; v1(55.8,71.16) 55.81,71.16 55.83,71.14 55.83,69.39 59.205,66.015 R8.2@68.034,66.015 R8.2@67.979,65.96 ; 55.83,70.723 cw(c56.237,70.723) v1@55.949,71.011 ; R8.2@67.827,65.808 ccw(c67.329,65.309) 67.329,66.015 ccw(c67.329,66.72) R8.2@67.827,66.221
  Bottom Layer w0.178: v1(43.68,71.26) 43.8,71.14 v1(47.41,71.14) ; v1@43.703,71.283 ccw(c44.05,71.63) 44.05,71.14 ; v1@43.829,71.409 ccw(c44.479,72.059) 44.479,71.14 ; v1@47.261,70.991 ccw(c46.9,70.63) 46.9,71.14 ccw(c46.9,71.649) v1@47.261,71.289 ; v1(52.01,71.14) 55.83,71.14 55.81,71.16 v1(55.8,71.16) ; v1@52.159,70.991 cw(c52.52,70.63) 52.52,71.14 cw(c52.52,71.649) v1@52.159,71.289 ; 55.242,71.14 ccw(c55.242,71.718) v1@55.651,71.309 ; 55.339,71.14 cw(c55.339,70.699) v1@55.651,71.011
PLCRXD: C25.1 N1.6 P1.5 R6.1 U5.58 | length 55.4
  Top Layer w0.178: C25.1@27,65.583 28.273,65.583 29.301,66.611 U5.58@30.954,66.611 31.991,66.611 32.38,67 40.091,67 41.49,65.601 v1(41.49,64.46) ; C25.1@27.207,65.376 cw(c27.705,64.878) 27.705,65.583 cw(c27.705,66.288) C25.1@27.207,65.789 ; v1@41.341,64.609 ccw(c40.98,64.97) 41.49,64.97 ccw(c42,64.97) v1@41.639,64.609 ; v1@44,63.419 cw(c44,62.909) 44.36,63.27 cw(c44.721,63.63) v1@44.211,63.63 ; v1(44,63.63) 45.224,62.406 45.36,62.406 v1(45.36,62.33) ; 44.897,62.733 ccw(c45.36,63.196) v1@45.36,62.541 ; 45.042,62.588 cw(c44.784,62.33) v1@45.149,62.33 ; v1@45.475,57.265 46.229,57.265 ; v1@45.549,57.191 cw(c45.729,57.011) 45.729,57.265 ; v1@45.549,57.489 ccw(c46.09,58.03) 46.09,57.265 ; 46.249,57.285 46.319,57.214 54.388,57.214 54.583,57.02 P1.5@54.583,55.633 ; P1.5@54.414,56.758 ccw(c54.296,57.02) 54.583,57.02 ccw(c54.87,57.02) P1.5@54.752,56.758
  Top Layer w0.254: P1.5@54.362,54.583 cw(c54.043,54.147) 54.583,54.147 ; P1.5@54.583,55.633 54.583,54.147 ; P1.5@54.804,54.583 ccw(c55.123,54.147) 54.583,54.147 ; R6.1@55.694,51.898 ccw(c55.26,52.332) 55.873,52.332 ccw(c56.487,52.332) 56.053,51.898 ccw(c56.487,52.332) 56.487,51.718 ccw(c56.487,51.105) R6.1@56.053,51.539 ; 57.336,51.718 cw(c57.336,51.213) N1.6@57.694,51.57 ; 57.547,51.749 cw(c57.711,51.585) N1.6@57.863,51.76 ; N1.6@57.681,51.592 ccw(c57.517,51.548) 57.517,51.718 ; N1.6@57.728,51.929 57.517,51.718 ; 54.583,54.147 55.873,52.857 R6.1@55.873,51.718 57.517,51.718
  Bottom Layer w0.178: v1(41.49,64.46) 43.17,64.46 v1(44,63.63) ; v1@41.639,64.311 cw(c42,63.95) 42,64.46 cw(c42,64.97) v1@41.639,64.609 ; v1@43.789,63.63 ccw(c43.279,63.63) 43.64,63.99 ccw(c44,64.351) v1@44,63.841 ; v1@45.211,62.181 cw(c44.754,61.724) 45.4,61.724 ; v1@45.251,57.489 ccw(c44.89,57.85) 45.4,57.85 ccw(c45.91,57.85) v1@45.549,57.489 ; v1(45.4,57.34) v1@45.4,62.09 ; 45.4,61.917 cw(c45.773,61.917) v1@45.509,62.181